# EAGLE board PT8211_T3_0.2 (EAGLE 7.4.0)
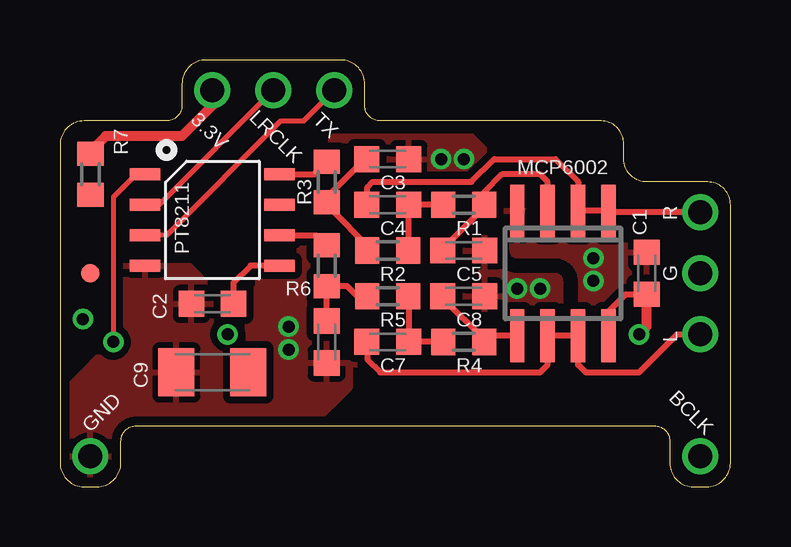
[diagram p0: board, top side]
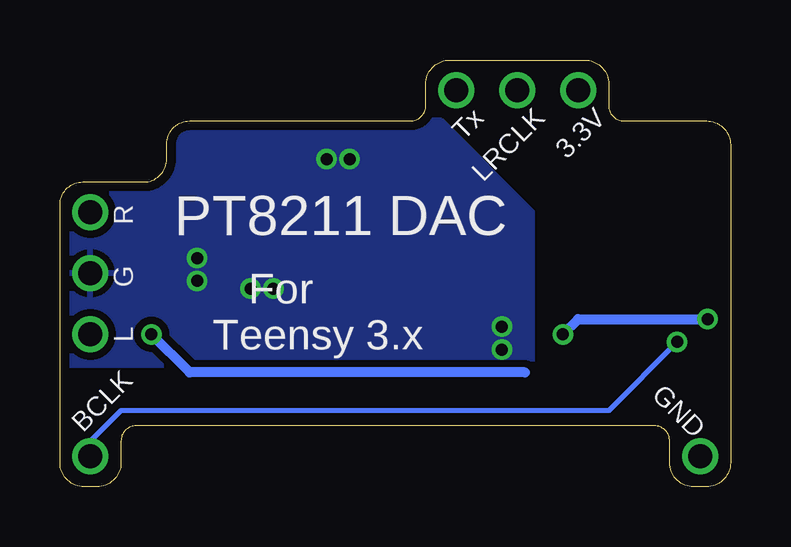
[diagram p1: board, bottom side, seen from below]

Size 27.94 x 17.78 mm. Coordinates in mm from the lower left corner, seen from the top.
Outline: 27.94,1 arc-90 26.94,0 26.4,0 arc-90 25.4,1 25.4,1.91 arc90 24.77,2.54 3.17,2.54 arc90 2.54,1.91 2.54,1 arc-90 1.54,0 1,0 arc-90 0,1 0,14.24 arc-90 1,15.24 4.45,15.24 arc90 5.08,15.88 5.08,16.78 arc-90 6.08,17.78 11.7,17.78 arc-90 12.7,16.78 12.7,15.88 arc90 13.34,15.24 22.54,15.24 arc-90 23.5,14.29 23.5,13.65 arc90 24.45,12.7 26.99,12.7 arc-90 27.94,11.75 27.94,0.95
Copper layers (1*16): layer 1 0.0356mm / dielectric 1.5011mm / layer 16 0.0356mm
Design rules "oshpark *": minimum track width 6mil, minimum drill 13mil, track to track 6mil, track to pad 6mil, pad to pad 6mil, via to via 6mil, smd to smd 6mil, copper to edge 15mil, drill to drill 6mil, minimum pad ring 7mil, minimum via ring 7mil, stop-mask expansion 3mil, vias tented up to drill 24mil, thermal gap 10mil
tRestrict: 12 lines

## Footprints (pad centres in the part's own frame; a part is rotated, then mirrored left to right if it is on the bottom)
SOLPAD1MM = drill 1: P$1 0,0
C0603K = smd 1.05 x 1.08: 1 -0.875,0; 2 0.875,0
C1206K = smd 1.5 x 2: 1 -1.5,0; 2 1.5,0
SO08 = smd 0.6 x 2.2: 1 -1.905,-2.6; 2 -0.635,-2.6; 3 0.635,-2.6; 4 1.905,-2.6; 5 1.905,2.6; 6 0.635,2.6; 7 -0.635,2.6; 8 -1.905,2.6
R0603 = smd 1 x 1.1: 1 -0.85,0; 2 0.85,0
PAD.03X.03 = smd 0.762 x 0.762: P$1 0,0
SOP8-6.0-4.9X3.9 = smd 0.5 x 1.27: 1 -1.905,-2.8; 2 -0.635,-2.8; 3 0.635,-2.8; 4 1.905,-2.8; 5 1.905,2.8; 6 0.635,2.8; 7 -0.635,2.8; 8 -1.905,2.8

## Placement (x,y rotation side)
3.3V  SOLPAD1,0MM  [SOLPAD1MM]  6.35,16.51 0 top
BCLK  SOLPAD1,0MM  [SOLPAD1MM]  26.67,1.27 0 top
C1  X7R-G0603 100N  [C0603K]  24.45,8.89 90 top
C2  X7R-G0603 100N  [C0603K]  6.35,7.62 180 top
C3  NPO-G0603 330P  [C0603K]  13.65,13.65 0 top
C4  NPO-G0603 330P  [C0603K]  13.65,11.75 0 top
C5  NPO-G0603 47P  [C0603K]  16.83,9.84 180 top
C6  NPO-G0603 330P  [C0603K]  11.11,6.03 270 top
C7  NPO-G0603 330P  [C0603K]  13.65,6.03 0 top
C8  NPO-G0603 47P  [C0603K]  16.83,7.94 180 top
C9  X5R-G1206 100/6  [C1206K]  6.35,4.76 180 top
G  SOLPAD1,0MM  [SOLPAD1MM]  26.67,8.89 0 top
GND  SOLPAD1,0MM  [SOLPAD1MM]  1.27,1.27 0 top
L  SOLPAD1,0MM  [SOLPAD1MM]  26.67,6.35 0 top
LRCLK  SOLPAD1,0MM  [SOLPAD1MM]  8.89,16.51 0 top
MCP6002  MCP6002  [SO08]  20.95,8.89 180 top
R  SOLPAD1,0MM  [SOLPAD1MM]  26.67,11.43 0 top
R1  SMD-0603 33K  [R0603]  16.83,11.75 0 top
R2  SMD-0603 68K  [R0603]  13.65,9.84 0 top
R3  SMD-0603 22K  [R0603]  11.11,12.7 270 top
R4  SMD-0603 33K  [R0603]  16.83,6.03 0 top
R5  SMD-0603 68K  [R0603]  13.65,7.94 0 top
R6  SMD-0603 22K  [R0603]  11.11,9.21 270 top
R7  SMD-0603 10  [R0603]  1.27,13.02 270 top
TP1  TEST-POINT3  [PAD.03X.03]  1.27,8.89 0 top
TX  SOLPAD1,0MM  [SOLPAD1MM]  11.43,16.51 0 top
U1  PT8211  [SOP8-6.0-4.9X3.9]  6.35,11.11 270 top

## Library data of the parts
3.3V BCLK G GND L LRCLK R TX = Teensy3_MicroSD
C1-C9 R1-R7 = rcl
MCP6002 = linear
TP1 = SparkFun
U1 = IC

## Nets
BCK: BCLK.P$1 U1.1
DIN: TX.P$1 U1.3
GND: C1.2 C2.2 C3.2 C5.1 C6.2 C8.1 C9.2 G.P$1 GND.P$1 MCP6002.4 U1.4
N$1: C6.1 R5.1 R6.2
N$2: C7.2 R4.1 R5.2
N$3: C8.2 MCP6002.5 R4.2
N$4: C3.1 R2.1 R3.2
N$5: C4.2 R1.1 R2.2
N$6: C5.2 MCP6002.3 R1.2
N$7: 3.3V.P$1 R7.1
N$9: R6.1 U1.6
N$10: R3.1 U1.8
OUTL: C7.1 L.P$1 MCP6002.6 MCP6002.7
OUTR: C4.1 MCP6002.1 MCP6002.2 R.P$1
VDD: C1.1 C2.1 C9.1 MCP6002.8 R7.2 U1.5
WS: LRCLK.P$1 U1.2

## Tracks (layer width: path | path; a pad name or v marks a point on that pad's centre or on a via)
BCK  (via drill 0.5)
  layer 1 0.203: U1.1 3.17,13.02 2.22,12.06 v2.22,6.03
  layer 16 0.203: BCLK.P$1 26.67,1.91 25.4,3.17 5.08,3.17 v2.22,6.03
DIN
  layer 1 0.203: U1.3 4.45,10.48 9.21,15.24 10.16,15.24 TX.P$1
GND  (via drill 0.5)
  other vias: 20,8.26 19.05,8.26 22.23,8.57 22.23,9.53 9.53,6.67 15.88,13.65 16.83,13.65 9.53,5.71
  pour layer 1 (isolate 0.305, rank 2): 0,0 0,3.81 2.54,6.35 2.54,9.21 5.4,9.21 6.35,8.26 8.26,8.26 8.26,11.43 11.43,14.61 17.14,14.61 18.41,13.34 23.5,13.34 23.5,10.48 25.08,10.48 25.08,5.08 12.06,5.08 12.06,4.13 10.48,2.54 3.17,2.54 3.17,0
  pour layer 16 (isolate 0.305, rank 2): 8.26,5.08 8.26,11.43 12.06,15.24 27.94,15.24 27.94,5.08
N$1
  layer 1 0.254: R5.1 12.38,7.94 11.96,8.36 R6.2 C6.1
N$2
  layer 1 0.254: R5.2 14.53,7.91 C7.2 R4.1
N$3
  layer 1 0.254: C8.2 15.95,7.86 17.68,6.13 R4.2 17.93,6.29 MCP6002.5
N$4
  layer 1 0.254: C3.1 13.02,13.65 12.7,13.34 12.38,13.34 11.11,12.06 R3.2 11.11,11.75 13.02,9.84 R2.1
N$5
  layer 1 0.203: 14.5,11.72 C4.2
  layer 1 0.254: R1.1 C4.2 | 14.5,11.72 R2.2
N$6
  layer 1 0.254: MCP6002.3 20.32,12.7 20,13.02 18.41,13.02 17.68,12.28 R1.2 17.68,11.64 15.95,9.92 C5.2
N$7
  layer 1 0.406: 3.3V.P$1 6.35,15.88 5.08,14.61 1.91,14.61 1.27,13.97 R7.1
N$9
  layer 1 0.254: 11.01,10.16 R6.1 10.69,10.48 U1.6
N$10
  layer 1 0.254: U1.8 10.58,13.02 R3.1
OUTL
  layer 1 0.254: C7.1 12.8,5.29 13.34,4.76 20,4.76 20.32,5.08 MCP6002.6 MCP6002.7 21.59,5.08 21.91,4.76 24.13,4.76 25.72,6.35 L.P$1
OUTR
  layer 1 0.254: C4.1 12.8,12.48 13.02,12.7 17.14,12.7 18.1,13.65 20.64,13.65 21.59,12.7 MCP6002.2 MCP6002.1 22.92,11.43 R.P$1
VDD  (via drill 0.5)
  layer 1 0.254: U1.5 7.94,9.21 7.22,8.49 C2.1 | MCP6002.8 22.86,7.3 23.57,8.02 C1.1
  layer 1 0.406: C2.1 7.3,7.54 | v24.13,6.35 24.45,6.67 C1.1
  layer 16 0.406: 8.57,4.76 22.54,4.76 v24.13,6.35 | v6.99,6.35 6.35,6.99 v0.95,6.99
WS
  layer 1 0.203: LRCLK.P$1 4.13,11.75 U1.2

## Text on the board
layer 26: 3.3V | LRCLK | Tx | R | PT8211 DAC | G | L | For / Teensy 3.x | GND | BCLK
Reference: Vin | AGND | 3.3V | 23 LRCLK | 22 TX | 21 | 20 | 19 | 18 | 17 | 16 | 15 | 14 | 13 | A14/DAC | Program | GND | Prog.Btn | 3.3V | VBat | GND | 0 | 1 | 2 | 3 | 4 | 5 | 6 | 7 | 8 | BCLK 9 | 10 | 11 | 12